# EAGLE board led-er-v3-module (EAGLE 7.5.0)
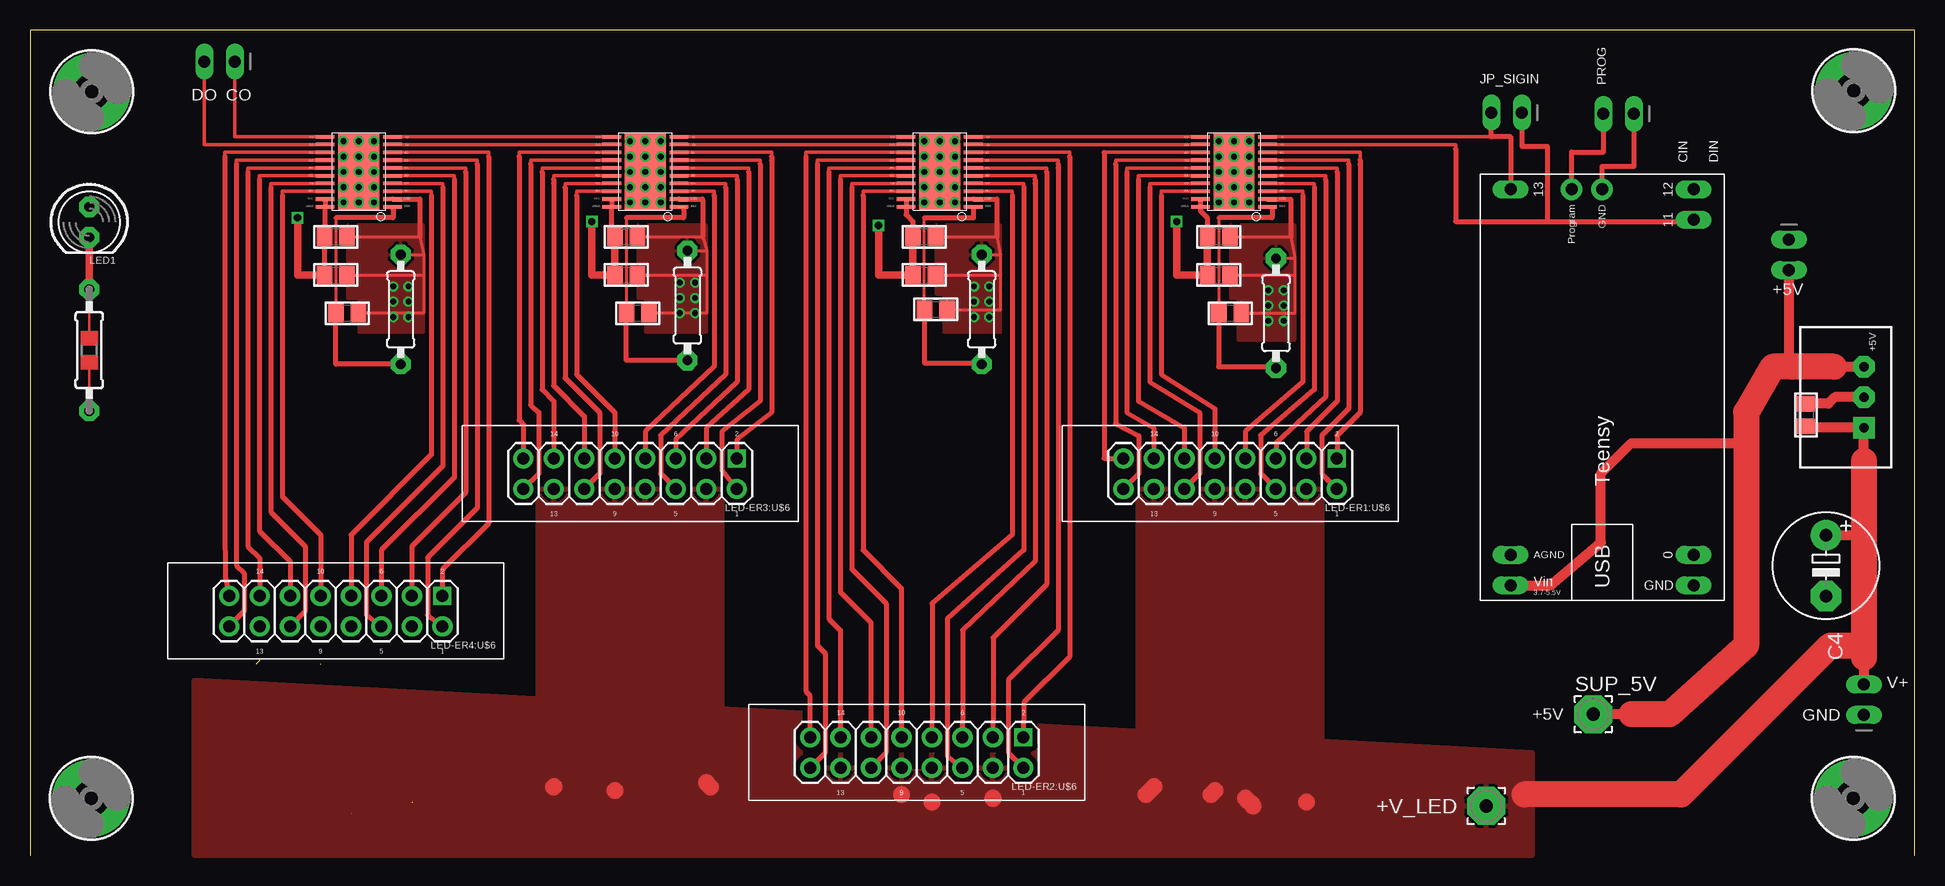
[diagram p0: board, top side]
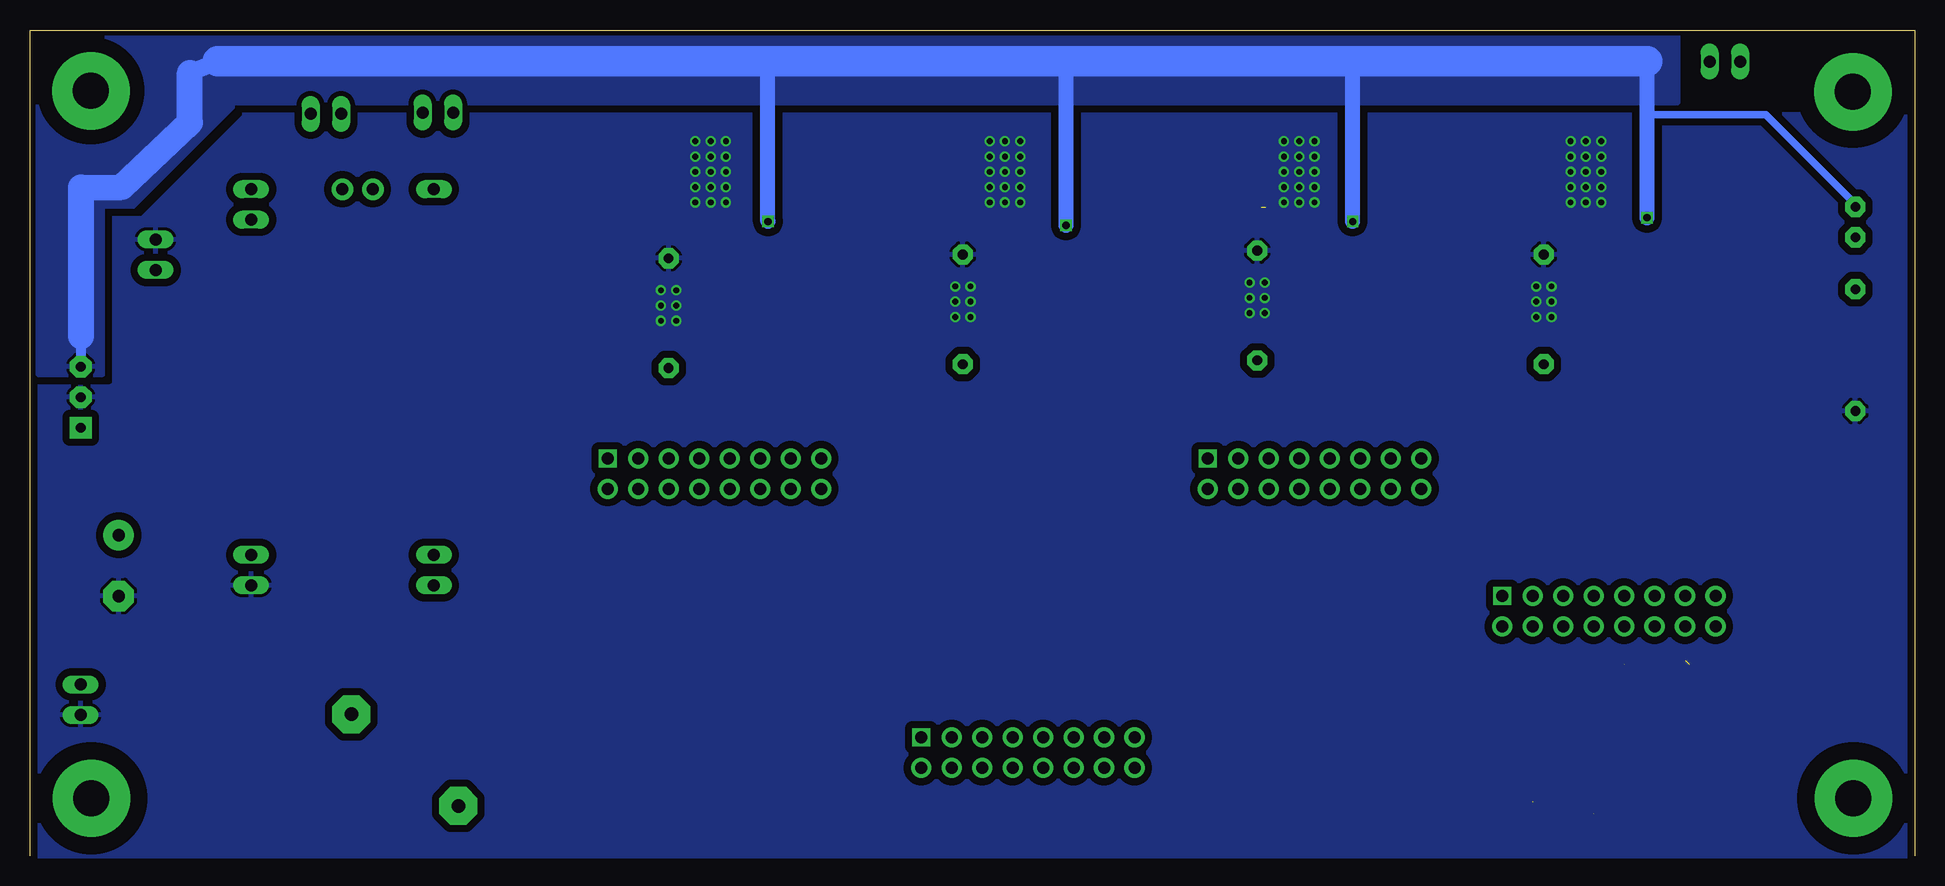
[diagram p1: board, bottom side, seen from below]

Size 157.05 x 68.84 mm. Coordinates in mm from the lower left corner, seen from the top.
Outline: 157.05,0 157.05,68.84 0,68.84 0,0
Copper layers (1*16): Top 0.0356mm / dielectric 1.5011mm / Bottom 0.0356mm
Design rules "LaenPCBOrder": minimum track width 6mil, minimum drill 13mil, track to track 6mil, track to pad 6mil, pad to pad 6mil, via to via 6mil, smd to smd 6mil, copper to edge 15mil, drill to drill 6mil, minimum pad ring 7mil, minimum via ring 7mil, stop-mask expansion 3mil, vias tented up to drill 0mil, thermal gap 10mil
tRestrict: area 24.5,20.1 to 25.2,21.7; area 73.6,7.6 to 74.2,8.6

## Footprints (pad centres in the part's own frame; a part is rotated, then mirrored left to right if it is on the bottom)
3,17/1,1 = drill 1.118 pad 3.175 octagon: 1 0,0
0805 = smd 1.3 x 1.5: 1 -0.95,0; 2 0.95,0
E5-8,5 = drill 1.016 pad 2.54: + -2.54,0 | drill 1.016 pad 2.54 octagon: - 2.54,0
1X02_OVAL = drill 1 long: 1 -1.27,0; 2 1.27,0
LED5MM = drill 0.813 pad 1.676 octagon: A -1.27,0; K 1.27,0
0207/9 = drill 0.813 pad 1.676 octagon: 1 -4.572,0; 2 4.572,0
HTSSOP20DAP = smd 0.3 x 1.55: 1 -2.925,-2.8; 2 -2.275,-2.8; 3 -1.625,-2.8; 4 -0.975,-2.8; 5 -0.325,-2.8; 6 0.325,-2.8; 7 0.975,-2.8; 8 1.625,-2.8; 9 2.275,-2.8; 10 2.925,-2.8; 11 2.925,2.8; 12 2.275,2.8; 13 1.625,2.8; 14 0.975,2.8; 15 0.325,2.8; 16 -0.325,2.8; 17 -0.975,2.8; 18 -1.625,2.8; 19 -2.275,2.8; 20 -2.925,2.8 | smd 6.5 x 3.4: EXP 0,0
2X08_RIBBON = drill 1 pad 1.676: P1 -8.89,1.27; P3 -6.35,1.27; P4 -6.35,-1.27; P5 -3.81,1.27; P6 -3.81,-1.27; P7 -1.27,1.27; P8 -1.27,-1.27; P9 1.27,1.27; P10 1.27,-1.27; P11 3.81,1.27; P12 3.81,-1.27; P13 6.35,1.27; P14 6.35,-1.27; P15 8.89,1.27; P16 8.89,-1.27 | drill 1 square: P2 -8.89,-1.27
0805-THM = drill 0.813 pad 1.676 octagon: 1 -5.08,0; 2 5.08,0
TSR-1 = drill 0.8 pad 1.8 square: 1 -2.54,-1.5 | drill 0.8 pad 1.8 octagon: 2 0,-1.5; 3 2.54,-1.5
MOUNTINGHOLE_3.0_PLATED = drill 3 pad 6.452: P$1 0,0
TEENSY_LEDER = drill 1 pad 1.422 long: 0 12.7,7.62; 11 -15.24,7.62; 12 -17.78,7.62; 13 -17.78,-7.62; AGND 12.7,-7.62; GND 15.24,7.62; VIN 15.24,-7.62 | drill 1 pad 1.778: GND2 -17.78,0; PROG -17.78,-2.54

## Placement (x,y rotation side)
+V_LED  [3,17/1,1]  121.35,4.14 0 top
C3  10uF/16V  [0805]  148,36.74 90 top
C4  220uF+  [E5-8,5]  149.67,24.18 270 top
JP_5V  [1X02_OVAL]  146.58,50.09 270 top
JP_15VIN  [1X02_OVAL]  152.83,13 90 top
JP_PROG  [1X02_OVAL]  132.39,61.85 180 top
JP_SIGIN  [1X02_OVAL]  123.05,61.95 180 top
JP_SIGOUT  [1X02_OVAL]  15.8,66.21 180 top
LED1  Green  [LED5MM]  4.93,52.82 270 top
LED-ER1:C5  1uF/50V  [0805]  99.06,51.6 0 top
LED-ER1:C11  10uF 25V  [0805]  99.06,48.41 0 top
LED-ER1:R3  22K  [0805]  100.01,45.23 0 top
LED-ER1:R6  [0207/9]  103.84,45.23 90 top
LED-ER1:TLC1  TLC59711  [HTSSOP20DAP]  100.33,57.01 90 top
LED-ER1:U$6  HEADER-2X8-RIBBON  [2X08_RIBBON]  100.01,31.85 180 top
LED-ER2:C5  1uF/50V  [0805]  74.53,51.6 0 top
LED-ER2:C11  10uF 25V  [0805]  74.53,48.41 0 top
LED-ER2:R3  22K  [0805]  75.49,45.55 0 top
LED-ER2:R6  [0207/9]  79.31,45.55 90 top
LED-ER2:TLC1  TLC59711  [HTSSOP20DAP]  75.81,57.01 90 top
LED-ER2:U$6  HEADER-2X8-RIBBON  [2X08_RIBBON]  73.9,8.6 180 top
LED-ER3:C5  1uF/50V  [0805]  49.69,48.41 0 top
LED-ER3:C11  10uF 25V  [0805]  49.69,51.6 0 top
LED-ER3:R3  22K  [0805]  50.64,45.23 0 top
LED-ER3:R6  [0207/9]  54.78,45.87 90 top
LED-ER3:TLC1  TLC59711  [HTSSOP20DAP]  51.28,57.01 90 top
LED-ER3:U$6  HEADER-2X8-RIBBON  [2X08_RIBBON]  50.01,31.85 180 top
LED-ER4:C5  1uF/50V  [0805]  25.48,48.41 0 top
LED-ER4:C11  10uF 25V  [0805]  25.48,51.6 0 top
LED-ER4:R3  22K  [0805]  26.44,45.23 0 top
LED-ER4:R6  [0207/9]  30.9,45.55 90 top
LED-ER4:TLC1  TLC59711  [HTSSOP20DAP]  27.39,57.01 90 top
LED-ER4:U$6  HEADER-2X8-RIBBON  [2X08_RIBBON]  25.48,20.39 180 top
R2  470  [0805-THM]  4.93,42.15 90 top
SUP_5V  [3,17/1,1]  130.27,11.79 0 top
TSR1-2450  TSR1-2450  [TSR-1]  151.32,38.23 90 top
U$1  MOUNTINGHOLE  [MOUNTINGHOLE_3.0_PLATED]  151.98,63.77 0 top
U$2  MOUNTINGHOLE  [MOUNTINGHOLE_3.0_PLATED]  5.1,4.78 0 top
U$3  MOUNTINGHOLE  [MOUNTINGHOLE_3.0_PLATED]  5.15,63.69 0 top
U$4  MOUNTINGHOLE  [MOUNTINGHOLE_3.0_PLATED]  151.93,4.78 0 top
U$5  TEENSY_LEDER  [TEENSY_LEDER]  131.01,37.78 270 top

## Library data of the parts
+V_LED SUP_5V = wirepad
C3 JP_5V JP_15VIN JP_PROG JP_SIGIN JP_SIGOUT LED-ER1:C5 LED-ER1:C11 LED-ER1:R3 LED-ER2:C5 LED-ER2:C11 LED-ER2:R3 LED-ER3:C5 LED-ER3:C11 LED-ER3:R3 LED-ER4:C5 LED-ER4:C11 LED-ER4:R3 R2 U$1-U$4 = microbuilder
C4 LED1 LED-ER1:R6 LED-ER1:TLC1 LED-ER2:R6 LED-ER2:TLC1 LED-ER3:R6 LED-ER3:TLC1 LED-ER4:R6 LED-ER4:TLC1 = adafruit
LED-ER1:U$6 LED-ER2:U$6 LED-ER3:U$6 LED-ER4:U$6 U$5 = Andrews
TSR1-2450 = SteelCaveRobotics-Power

## Nets
1SCKI: JP_SIGIN.2 LED-ER1:TLC1.10 U$5.13
1SDTI: JP_SIGIN.1 LED-ER1:TLC1.9 U$5.11
+5V: JP_5V.2 LED1.A LED-ER1:C5.1 LED-ER1:C11.1 LED-ER1:TLC1.19 LED-ER1:TLC1.20 LED-ER2:C5.1 LED-ER2:C11.1 LED-ER2:TLC1.19 LED-ER2:TLC1.20 LED-ER3:C5.1 LED-ER3:C11.1 LED-ER3:TLC1.19 LED-ER3:TLC1.20 LED-ER4:C5.1 LED-ER4:C11.1 LED-ER4:TLC1.19 LED-ER4:TLC1.20 SUP_5V.1 TSR1-2450.3 U$5.VIN
GND: C3.2 C4.- JP_5V.1 JP_15VIN.1 LED-ER1:C5.2 LED-ER1:C11.2 LED-ER1:R3.2 LED-ER1:R6.2 LED-ER1:TLC1.2 LED-ER1:TLC1.EXP LED-ER2:C5.2 LED-ER2:C11.2 LED-ER2:R3.2 LED-ER2:R6.2 LED-ER2:TLC1.2 LED-ER2:TLC1.EXP LED-ER3:C5.2 LED-ER3:C11.2 LED-ER3:R3.2 LED-ER3:R6.2 LED-ER3:TLC1.2 LED-ER3:TLC1.EXP LED-ER4:C5.2 LED-ER4:C11.2 LED-ER4:R3.2 LED-ER4:R6.2 LED-ER4:TLC1.2 LED-ER4:TLC1.EXP R2.1 TSR1-2450.2 U$5.GND
LED-ER1:B0: LED-ER1:TLC1.5 LED-ER1:U$6.P6
LED-ER1:B1: LED-ER1:TLC1.8 LED-ER1:U$6.P2
LED-ER1:B2: LED-ER1:TLC1.15 LED-ER1:U$6.P14
LED-ER1:B3: LED-ER1:TLC1.18 LED-ER1:U$6.P10
LED-ER1:G0: LED-ER1:TLC1.4 LED-ER1:U$6.P5
LED-ER1:G1: LED-ER1:TLC1.7 LED-ER1:U$6.P1
LED-ER1:G2: LED-ER1:TLC1.14 LED-ER1:U$6.P15
LED-ER1:G3: LED-ER1:TLC1.17 LED-ER1:U$6.P11
LED-ER1:IREF: LED-ER1:R3.1 LED-ER1:R6.1 LED-ER1:TLC1.1
LED-ER1:R0: LED-ER1:TLC1.3 LED-ER1:U$6.P8
LED-ER1:R1: LED-ER1:TLC1.6 LED-ER1:U$6.P4
LED-ER1:R2: LED-ER1:TLC1.13 LED-ER1:U$6.P16
LED-ER1:R3: LED-ER1:TLC1.16 LED-ER1:U$6.P12
LED-ER2:B0: LED-ER2:TLC1.5 LED-ER2:U$6.P6
LED-ER2:B1: LED-ER2:TLC1.8 LED-ER2:U$6.P2
LED-ER2:B2: LED-ER2:TLC1.15 LED-ER2:U$6.P14
LED-ER2:B3: LED-ER2:TLC1.18 LED-ER2:U$6.P10
LED-ER2:G0: LED-ER2:TLC1.4 LED-ER2:U$6.P5
LED-ER2:G1: LED-ER2:TLC1.7 LED-ER2:U$6.P1
LED-ER2:G2: LED-ER2:TLC1.14 LED-ER2:U$6.P15
LED-ER2:G3: LED-ER2:TLC1.17 LED-ER2:U$6.P11
LED-ER2:IREF: LED-ER2:R3.1 LED-ER2:R6.1 LED-ER2:TLC1.1
LED-ER2:R0: LED-ER2:TLC1.3 LED-ER2:U$6.P8
LED-ER2:R1: LED-ER2:TLC1.6 LED-ER2:U$6.P4
LED-ER2:R2: LED-ER2:TLC1.13 LED-ER2:U$6.P16
LED-ER2:R3: LED-ER2:TLC1.16 LED-ER2:U$6.P12
LED-ER3:B0: LED-ER3:TLC1.5 LED-ER3:U$6.P6
LED-ER3:B1: LED-ER3:TLC1.8 LED-ER3:U$6.P2
LED-ER3:B2: LED-ER3:TLC1.15 LED-ER3:U$6.P14
LED-ER3:B3: LED-ER3:TLC1.18 LED-ER3:U$6.P10
LED-ER3:G0: LED-ER3:TLC1.4 LED-ER3:U$6.P5
LED-ER3:G1: LED-ER3:TLC1.7 LED-ER3:U$6.P1
LED-ER3:G2: LED-ER3:TLC1.14 LED-ER3:U$6.P15
LED-ER3:G3: LED-ER3:TLC1.17 LED-ER3:U$6.P11
LED-ER3:IREF: LED-ER3:R3.1 LED-ER3:R6.1 LED-ER3:TLC1.1
LED-ER3:R0: LED-ER3:TLC1.3 LED-ER3:U$6.P8
LED-ER3:R1: LED-ER3:TLC1.6 LED-ER3:U$6.P4
LED-ER3:R2: LED-ER3:TLC1.13 LED-ER3:U$6.P16
LED-ER3:R3: LED-ER3:TLC1.16 LED-ER3:U$6.P12
LED-ER4:B0: LED-ER4:TLC1.5 LED-ER4:U$6.P6
LED-ER4:B1: LED-ER4:TLC1.8 LED-ER4:U$6.P2
LED-ER4:B2: LED-ER4:TLC1.15 LED-ER4:U$6.P14
LED-ER4:B3: LED-ER4:TLC1.18 LED-ER4:U$6.P10
LED-ER4:G0: LED-ER4:TLC1.4 LED-ER4:U$6.P5
LED-ER4:G1: LED-ER4:TLC1.7 LED-ER4:U$6.P1
LED-ER4:G2: LED-ER4:TLC1.14 LED-ER4:U$6.P15
LED-ER4:G3: LED-ER4:TLC1.17 LED-ER4:U$6.P11
LED-ER4:IREF: LED-ER4:R3.1 LED-ER4:R6.1 LED-ER4:TLC1.1
LED-ER4:R0: LED-ER4:TLC1.3 LED-ER4:U$6.P8
LED-ER4:R1: LED-ER4:TLC1.6 LED-ER4:U$6.P4
LED-ER4:R2: LED-ER4:TLC1.13 LED-ER4:U$6.P16
LED-ER4:R3: LED-ER4:TLC1.16 LED-ER4:U$6.P12
N$1: LED1.K R2.2
N$2: LED-ER1:TLC1.11 LED-ER2:TLC1.10
N$3: LED-ER1:TLC1.12 LED-ER2:TLC1.9
N$4: LED-ER2:TLC1.11 LED-ER3:TLC1.10
N$5: LED-ER2:TLC1.12 LED-ER3:TLC1.9
N$6: LED-ER3:TLC1.11 LED-ER4:TLC1.10
N$7: LED-ER3:TLC1.12 LED-ER4:TLC1.9
N$8: JP_SIGOUT.1 LED-ER4:TLC1.11
N$9: JP_SIGOUT.2 LED-ER4:TLC1.12
N$54: JP_PROG.1 U$5.GND2
N$55: JP_PROG.2 U$5.PROG
VIN: +V_LED.1 C3.1 C4.+ JP_15VIN.2 LED-ER1:U$6.P3 LED-ER1:U$6.P7 LED-ER1:U$6.P9 LED-ER1:U$6.P13 LED-ER2:U$6.P3 LED-ER2:U$6.P7 LED-ER2:U$6.P9 LED-ER2:U$6.P13 LED-ER3:U$6.P3 LED-ER3:U$6.P7 LED-ER3:U$6.P9 LED-ER3:U$6.P13 LED-ER4:U$6.P3 LED-ER4:U$6.P7 LED-ER4:U$6.P9 LED-ER4:U$6.P13 TSR1-2450.1

## Tracks (layer width: path | path; a pad name or v marks a point on that pad's centre or on a via)
1SCKI
  Top 0.305: LED-ER1:TLC1.10 121.78,59.94
  Top 0.406: U$5.13 123.39,59.94 121.78,59.94 JP_SIGIN.2
1SDTI
  Top 0.305: LED-ER1:TLC1.9 118.81,59.29 118.81,58.92 | 138.63,52.87 U$5.11
  Top 0.406: JP_SIGIN.1 124.32,59.14 126.45,59.14 126.45,52.87 | 118.81,58.92 118.81,52.87 126.45,52.87 | 126.45,52.87 138.63,52.87
+5V  (via drill 0.6)
  Top 0.254: LED-ER1:TLC1.20 | LED-ER3:TLC1.20 48.74,54.09 | LED-ER4:TLC1.20 24.53,54.09 | LED-ER2:C5.1 | LED-ER3:C11.1
  Top 0.305: LED-ER1:C5.1 | LED-ER2:C5.1 | LED-ER4:TLC1.19 24.6,54.61 | LED-ER3:TLC1.19 48.48,54.63 | LED-ER2:TLC1.19 | LED-ER2:TLC1.19 73.01,54.63 | LED-ER1:TLC1.19 97.53,54.65
  Top 0.406: LED-ER4:C5.1 LED-ER4:C11.1 24.59,51.6 LED-ER4:TLC1.20 24.59,54.61 24.6,54.61 | LED-ER1:C5.1 98.1,53.19 97.53,53.76 LED-ER1:TLC1.20 97.53,54.65 | LED-ER2:C5.1 73.58,52.87 73.01,53.44 LED-ER2:TLC1.20 73.01,54.63 | LED-ER3:C11.1 48.48,51.6 LED-ER3:TLC1.20 48.48,54.63 | 73.01,54.63 | LED-ER1:C11.1 | LED-ER2:C11.1
  Top 0.61: v95.56,52.87 95.56,48.41 LED-ER1:C11.1 LED-ER1:C5.1 | v70.71,52.55 70.71,48.41 LED-ER2:C11.1 LED-ER2:C5.1 | LED-ER3:C11.1 LED-ER3:C5.1 46.82,48.41 v46.82,52.87 | LED-ER4:C5.1 22.3,48.41 v22.3,53.19
  Top 0.813: U$5.VIN 126.69,22.54 130.91,26.12 130.91,31.85 133.46,34.4 142.69,34.4 | 147.22,41.02 147.47,40.77 | 133.46,11.79 SUP_5V.1 | TSR1-2450.3 150.34,40.77 | JP_5V.2 146.58,41.02 146.84,40.77
  Top 1.422: 142.69,34.4 143.01,34.4 | 150.34,40.77
  Top 2.184: 133.46,11.79 136.64,11.79 143.01,17.52 143.01,34.4 143.01,36.95 145.24,40.77 146.84,40.77 147.47,40.77 150.34,40.77
  Bottom 0.305: LED1.A 4.93,54.3
  Bottom 0.61: 4.93,54.3 12.42,61.79 22.3,61.79
  Bottom 0.813: 152.81,43.32 TSR1-2450.3
  Bottom 1.016: 22.3,65.93 22.3,66.25
  Bottom 1.27: v95.56,52.87 95.56,66.25 | v70.71,52.55 70.71,66.25 | v46.82,52.87 46.82,66.25 | v22.3,53.19 22.3,61.79 22.3,65.93
  Bottom 1.422: 141.42,66.25 | 152.89,40.83 TSR1-2450.3 | 143.73,65.27 141.42,66.25
  Bottom 2.184: 143.73,65.27 143.73,61.13 149.38,55.74 152.82,55.72 152.81,43.32
  Bottom 2.54: 141.42,66.25 95.56,66.25 70.71,66.25 46.82,66.25 22.3,66.25
  pour Bottom (isolate 0.406): 19.75,62.75 144.61,62.75 144.61,68.8 19.75,68.8
  pour Bottom (isolate 0.406): 140.15,68.16 156.39,68.16 156.39,40.13 150.98,40.13 150.98,54.15 148.43,54.15 140.15,62.43
GND  (via drill 0.48)  (3 unrouted)
  Top 0.254: LED-ER1:C5.2 105.1,51.6 105.42,49.8 | LED-ER1:TLC1.2 | LED-ER1:R3.2 105.42,45.23 105.42,48.41 | 105.42,48.41 105.42,49.8 | LED-ER1:R6.2 105.42,49.8 | LED-ER2:C5.2 | LED-ER2:R3.2 80.9,45.55 80.9,48.41 | 80.9,48.41 80.9,50.12 | 80.9,50.12 80.58,51.6 LED-ER2:C5.2 | LED-ER2:R6.2 80.9,50.12 | 56.38,50.44 56.06,51.6 LED-ER3:C11.2 | 56.38,50.44 56.38,48.41 | 56.38,48.41 56.38,45.23 v55.42,45.23 v54.15,45.23 LED-ER3:R3.2 | LED-ER3:R3.2 | LED-ER3:R6.2 56.38,50.44 | 32.81,50.12 32.49,51.6 LED-ER4:C11.2 | 32.81,50.12 32.81,48.41 | 32.81,48.41 32.81,45.23 LED-ER4:R3.2 | LED-ER4:R6.2 32.81,50.12 | LED-ER4:C5.2 32.81,48.41 | LED-ER3:C5.2 56.38,48.41 | LED-ER2:C11.2 80.9,48.41 | LED-ER1:C11.2 105.42,48.41
  Top 0.305: 32.49,54.74 32.48,54.69 | 56.06,54.74 56.06,54.68 | 105.1,54.74 105.1,54.68
  Top 0.406: 105.1,51.6 105.1,54.68 | 80.58,51.6 80.58,54.74 LED-ER2:TLC1.2 | 56.06,54.68 56.06,51.6 | 32.48,54.69 32.49,51.6 | LED-ER4:TLC1.2 32.49,54.74 | LED-ER3:TLC1.2 56.06,54.74 | LED-ER1:TLC1.2 105.1,54.74
  Top 0.813: TSR1-2450.2 150.4,38.23 149.86,37.68 C3.2
  other vias: 26.12,59.56 27.39,59.56 28.67,59.56 26.12,58.29 27.39,58.29 26.12,57.01 27.39,57.01 28.67,57.01 26.12,55.74 27.39,55.74 28.67,55.74 26.12,54.47 27.39,54.47 28.67,54.47 28.67,58.29 99.06,59.56 100.33,59.56 101.61,59.56 99.06,58.29 100.33,58.29 101.61,58.29 99.06,57.01 100.33,57.01 101.61,57.01 99.06,55.74 100.33,55.74 101.61,55.74 99.06,54.47 100.33,54.47 101.61,54.47 74.53,59.56 75.81,59.56 77.08,59.56 74.53,58.29 75.81,58.29 77.08,58.29 74.53,57.01 75.81,57.01 77.08,57.01 74.53,55.74 75.81,55.74 77.08,55.74 74.53,54.47 75.81,54.47 77.08,54.47 50.01,59.56 51.28,59.56 52.56,59.56 50.01,58.29 51.28,58.29 50.01,57.01 51.28,57.01 52.56,57.01 50.01,55.74 51.28,55.74 52.56,55.74 50.01,54.47 51.28,54.47 52.56,54.47 52.56,58.29 30.26,47.46 30.26,46.18 31.53,46.18 30.26,44.91 31.53,44.91 31.53,47.46 54.15,47.78 55.42,47.78 54.15,46.5 55.42,46.5 78.67,47.46 78.67,46.18 78.67,44.91 79.95,44.91 79.95,46.18 79.95,47.46 103.2,47.14 104.47,47.14 103.2,45.87 104.47,45.87 103.2,44.59 104.47,44.59
  pour Top: 100.01,52.56 100.01,46.5 100.65,46.5 100.65,43 105.43,43 105.43,52.56
  pour Top: 75.49,52.56 75.49,46.82 76.13,46.82 76.13,43.64 80.9,43.64 80.9,52.56
  pour Top: 50.64,46.5 51.28,46.5 51.28,43.64 56.38,43.64 56.38,52.56 50.64,52.56
  pour Top: 26.44,52.56 26.44,46.5 27.39,46.5 27.39,43.64 32.81,43.64 32.81,52.56
  pour Bottom (isolate 0.61, rank 2): 0,61.79 157.67,61.79 156.71,0 0,0
LED-ER1:B0
  Top 0.305: 103.84,33.13 LED-ER1:U$6.P6 | LED-ER1:TLC1.5 107.98,56.69 107.98,56.37
  Top 0.406: 103.84,33.13 103.84,34.4 107.98,38.22 107.98,56.37
LED-ER1:B1
  Top 0.305: 108.93,33.15 LED-ER1:U$6.P2 | LED-ER1:TLC1.8 110.84,58.64 110.84,57.65
  Top 0.406: 110.84,58 110.84,57.65 110.84,36.95 108.93,35.04 108.93,33.15
LED-ER1:B2
  Top 0.305: LED-ER1:TLC1.15 91.41,57.34 91.41,57.02
  Top 0.406: 91.41,57.02 91.41,36.95 93.66,35.65 LED-ER1:U$6.P14
LED-ER1:B3
  Top 0.305: LED-ER1:TLC1.18 94.28,55.39 94.28,55.07
  Top 0.406: 94.28,55.07 94.28,40.13 98.74,37.26 LED-ER1:U$6.P10
LED-ER1:G0
  Top 0.305: LED-ER1:TLC1.4 107.02,56.04 107.02,55.72
  Top 0.406: 107.02,55.72 107.02,38.86 102.56,35.04 102.56,31.84 LED-ER1:U$6.P5
LED-ER1:G1
  Top 0.305: LED-ER1:TLC1.7 109.89,57.99 109.89,57.67
  Top 0.406: LED-ER1:U$6.P1 107.66,31.83 107.66,35.04 109.89,37.27 109.89,57.67
LED-ER1:G2
  Top 0.305: LED-ER1:TLC1.14 90.46,57.99 90.46,57.67
  Top 0.406: LED-ER1:U$6.P15 92.41,31.83 92.41,35 90.46,35.99 90.46,57.67
LED-ER1:G3
  Top 0.305: LED-ER1:TLC1.17 93.33,56.04 93.33,55.72
  Top 0.406: LED-ER1:U$6.P11 97.47,31.84 97.47,36.95 93.33,39.5 93.33,55.72
LED-ER1:IREF
  Top 0.254: LED-ER1:TLC1.1 103.52,54.09 | 99.06,53.19 LED-ER1:R3.1 | 103.84,40.77 LED-ER1:R6.1
  Top 0.305: 103.52,54.09 103.51,54.09 103.51,53.97
  Top 0.406: 99.06,53.19 103.52,53.19 103.52,53.97 103.51,53.97 | LED-ER1:R3.1 99.06,40.77 103.84,40.77
LED-ER1:R0
  Top 0.305: LED-ER1:U$6.P8 | LED-ER1:TLC1.3 106.07,55.39 106.07,55.07
  Top 0.406: 106.07,55.07 106.07,39.5 101.29,35.35 LED-ER1:U$6.P8
LED-ER1:R1
  Top 0.305: 106.38,33.14 LED-ER1:U$6.P4 | LED-ER1:TLC1.6 108.93,57.34 108.93,57.02
  Top 0.406: 106.38,33.14 106.38,35.35 108.93,37.9 108.93,57.02
LED-ER1:R2
  Top 0.305: LED-ER1:TLC1.13 89.5,58.64
  Top 0.406: 89.5,58.64 89.5,33.13 LED-ER1:U$6.P16
LED-ER1:R3
  Top 0.305: LED-ER1:TLC1.16 92.37,56.69 92.37,56.37
  Top 0.406: 92.37,56.37 92.37,37.9 96.2,35.66 LED-ER1:U$6.P12
LED-ER2:B0
  Top 0.305: LED-ER2:TLC1.5 83.77,56.69 83.77,56.06
  Top 0.406: 83.77,56.37 83.77,56.06 83.77,24.53 77.72,18.79 77.72,12.75 LED-ER2:U$6.P6
LED-ER2:B1
  Top 0.305: LED-ER2:TLC1.8 86.64,58.64 86.64,58.32
  Top 0.406: 86.64,58.32 86.64,16.59 82.81,12.77 LED-ER2:U$6.P2
LED-ER2:B2
  Top 0.305: LED-ER2:TLC1.15 66.57,57.34 66.57,57.02
  Top 0.406: 66.57,57.02 66.57,19.75 67.53,18.79 67.53,9.89 LED-ER2:U$6.P14
LED-ER2:B3
  Top 0.305: LED-ER2:TLC1.18 69.44,55.39 69.44,55.07
  Top 0.406: 69.44,55.07 69.44,25.48 72.62,22.3 LED-ER2:U$6.P10
LED-ER2:G0
  Top 0.305: LED-ER2:TLC1.4 82.81,56.04 82.81,55.74
  Top 0.406: 82.81,55.74 82.81,25.48 76.44,19.75 76.44,8.27 LED-ER2:U$6.P5
LED-ER2:G1
  Top 0.305: LED-ER2:TLC1.7 85.68,57.99 85.68,57.33
  Top 0.406: 85.68,57.67 85.68,57.33 85.68,18.79 81.54,14.65 81.54,8.58 LED-ER2:U$6.P1
LED-ER2:G2
  Top 0.305: LED-ER2:TLC1.14 65.61,57.99 65.61,57.33
  Top 0.406: LED-ER2:U$6.P15 66.25,8.58 66.25,16.88 65.61,17.52 65.61,57.33 65.61,57.67
LED-ER2:G3
  Top 0.305: LED-ER2:TLC1.17 68.48,56.04 68.48,55.42
  Top 0.406: 68.48,55.72 68.48,55.42 68.48,23.89 71.35,21.02 71.35,8.59 LED-ER2:U$6.P11
LED-ER2:IREF
  Top 0.254: 74.53,53.19 LED-ER2:R3.1 | 79.31,41.09 LED-ER2:R6.1
  Top 0.305: LED-ER2:TLC1.1 78.61,53.94
  Top 0.406: 74.53,53.19 78.61,53.19 78.61,53.94 | LED-ER2:R3.1 74.53,41.09 79.31,41.09
LED-ER2:R0
  Top 0.305: LED-ER2:TLC1.3 81.86,55.39 81.86,54.78
  Top 0.406: 81.86,55.07 81.86,54.78 81.86,26.75 75.17,21.02 75.17,12.74 LED-ER2:U$6.P8
LED-ER2:R1
  Top 0.305: LED-ER2:TLC1.6 84.72,57.34 84.72,57.02
  Top 0.406: 84.72,57.02 84.72,22.61 80.27,18.16 80.27,12.76 LED-ER2:U$6.P4
LED-ER2:R2
  Top 0.305: LED-ER2:TLC1.13 64.66,58.64 64.66,58.32
  Top 0.406: 64.66,58.32 64.66,13.7 64.98,13.38 64.98,9.9 LED-ER2:U$6.P16
LED-ER2:R3
  Top 0.305: LED-ER2:TLC1.16 67.53,56.69 67.53,56.37
  Top 0.406: 67.53,56.37 67.53,21.98 70.07,19.43 70.07,9.88 LED-ER2:U$6.P12
LED-ER3:B0
  Top 0.305: LED-ER3:TLC1.5 58.92,56.69 58.92,56.37
  Top 0.406: 58.92,56.37 58.92,39.5 53.82,34.71 LED-ER3:U$6.P6
LED-ER3:B1
  Top 0.305: LED-ER3:TLC1.8 61.79,58.64 61.79,57.97
  Top 0.406: 61.79,58.32 61.79,57.97 61.79,36.95 58.9,34.69 LED-ER3:U$6.P2
LED-ER3:B2
  Top 0.305: LED-ER3:TLC1.15 42.68,57.34 42.68,57.02
  Top 0.406: 42.68,57.02 42.68,38.86 43.66,37.88 LED-ER3:U$6.P14
LED-ER3:B3
  Top 0.305: LED-ER3:TLC1.18 45.55,55.39 45.55,55.07
  Top 0.406: 45.55,55.07 45.55,40.13 48.74,36.94 LED-ER3:U$6.P10
LED-ER3:G0
  Top 0.305: LED-ER3:TLC1.4 57.97,56.04 57.97,55.72
  Top 0.406: 57.97,55.72 57.97,40.13 52.55,35.04 52.55,31.84 LED-ER3:U$6.P5
LED-ER3:G1
  Top 0.305: LED-ER3:TLC1.7 60.84,57.99 60.84,57.67
  Top 0.406: 60.84,57.67 60.84,37.9 57.65,35.35 57.65,32.15 LED-ER3:U$6.P1
LED-ER3:G2
  Top 0.305: LED-ER3:TLC1.14 41.73,57.99 41.73,57.67
  Top 0.406: LED-ER3:U$6.P15 42.4,31.83 42.4,36.95 41.73,37.59 41.73,57.67
LED-ER3:G3
  Top 0.305: LED-ER3:TLC1.17 44.59,56.04 44.59,55.72
  Top 0.406: 44.59,55.72 44.59,39.81 47.46,36.95 47.46,31.84 LED-ER3:U$6.P11
LED-ER3:IREF  (1 unrouted)
  Top 0.254: 49.69,53.19 LED-ER3:R3.1
  Top 0.305: 54.47,54.09 54.47,53.9
  Top 0.406: 49.69,53.19 54.47,53.19 54.47,53.9 | LED-ER3:R6.1 49.69,41.29 LED-ER3:R3.1
LED-ER3:R0
  Top 0.305: LED-ER3:TLC1.3 57.01,55.39 57.01,55.07
  Top 0.406: 57.01,55.07 57.01,40.77 51.28,35.35 LED-ER3:U$6.P8
LED-ER3:R1
  Top 0.305: LED-ER3:TLC1.6 59.88,57.34 59.88,57.02
  Top 0.406: 59.88,57.02 59.88,38.86 56.36,35.65 LED-ER3:U$6.P4
LED-ER3:R2
  Top 0.305: LED-ER3:TLC1.13 40.77,58.64 40.77,58.32
  Top 0.406: 40.77,58.32 40.77,36.31 41.12,35.96 LED-ER3:U$6.P16
LED-ER3:R3
  Top 0.305: LED-ER3:TLC1.16 43.64,56.69 43.64,56.06
  Top 0.406: 43.64,56.37 43.64,56.06 43.64,39.18 46.2,36.62 LED-ER3:U$6.P12
LED-ER4:B0
  Top 0.305: LED-ER4:TLC1.5 35.35,56.69 35.35,56.37
  Top 0.406: 35.35,56.37 35.35,31.53 29.29,25.47 LED-ER4:U$6.P6
LED-ER4:B1
  Top 0.305: LED-ER4:TLC1.8 38.22,58.64 38.22,58.32
  Top 0.406: 38.22,58.32 38.22,27.71 34.37,23.86 LED-ER4:U$6.P2
LED-ER4:B2
  Top 0.305: LED-ER4:TLC1.15 18.16,57.34 18.16,57.02
  Top 0.406: 18.16,57.02 18.16,25.8 19.13,24.82 LED-ER4:U$6.P14
LED-ER4:B3
  Top 0.305: LED-ER4:TLC1.18 21.02,55.39 21.02,55.07
  Top 0.406: 21.02,55.07 21.02,29.94 24.21,26.75 LED-ER4:U$6.P10
LED-ER4:G0
  Top 0.305: LED-ER4:TLC1.4 34.4,56.04 34.4,55.72
  Top 0.406: 34.4,55.72 34.4,32.49 28.03,26.12 28.03,20.06 LED-ER4:U$6.P5
LED-ER4:G1
  Top 0.305: LED-ER4:TLC1.7 37.27,57.99 37.27,57.67
  Top 0.406: 37.27,57.67 37.27,28.98 33.13,24.84 33.13,20.04 LED-ER4:U$6.P1
LED-ER4:G2
  Top 0.305: LED-ER4:TLC1.14 17.2,57.99 17.2,57.67
  Top 0.406: 17.2,57.67 17.2,24.21 17.84,23.57 17.84,20.39 16.59,19.14 LED-ER4:U$6.P15
LED-ER4:G3
  Top 0.305: LED-ER4:TLC1.17 20.07,56.04 20.07,55.72
  Top 0.406: 20.07,55.72 20.07,28.67 22.93,25.8 22.93,20.39 LED-ER4:U$6.P11
LED-ER4:IREF
  Top 0.254: LED-ER4:TLC1.1 30.26,54.09 | 25.49,53.19 LED-ER4:R3.1
  Top 0.305: 30.26,54.09 30.26,53.89
  Top 0.406: 25.49,53.19 30.26,53.19 30.26,53.89 | LED-ER4:R6.1 25.49,40.98 LED-ER4:R3.1
LED-ER4:R0
  Top 0.305: LED-ER4:TLC1.3 33.44,55.39 33.44,55.07
  Top 0.406: 33.44,55.07 33.44,33.44 26.75,26.75 LED-ER4:U$6.P8
LED-ER4:R1
  Top 0.305: LED-ER4:TLC1.6 36.31,57.34 36.31,57.02
  Top 0.406: 36.31,57.02 36.31,30.26 31.83,25.78 LED-ER4:U$6.P4
LED-ER4:R2
  Top 0.305: LED-ER4:TLC1.13 16.24,58.64 16.24,57.97
  Top 0.406: 16.24,58.32 16.24,57.97 16.24,27.71 16.27,23.22 LED-ER4:U$6.P16
LED-ER4:R3
  Top 0.305: LED-ER4:TLC1.16 19.11,56.69 19.11,56.37
  Top 0.406: 19.11,56.37 19.11,27.07 21.67,24.51 LED-ER4:U$6.P12
N$1
  Top 0.305: R2.2
  Top 0.61: LED1.K R2.2
N$2
  Top 0.305: LED-ER2:TLC1.10 LED-ER1:TLC1.11 | LED-ER1:TLC1.11
N$3
  Top 0.305: LED-ER2:TLC1.9 LED-ER1:TLC1.12 | LED-ER1:TLC1.12
N$4
  Top 0.305: LED-ER2:TLC1.11 LED-ER3:TLC1.10
N$5
  Top 0.305: LED-ER3:TLC1.9 LED-ER2:TLC1.12
N$6
  Top 0.305: LED-ER3:TLC1.11 LED-ER4:TLC1.10
N$7
  Top 0.305: LED-ER4:TLC1.9 LED-ER3:TLC1.12
N$8
  Top 0.305: JP_SIGOUT.1 17.07,59.94 LED-ER4:TLC1.11
N$9
  Top 0.305: LED-ER4:TLC1.12 14.53,59.29 JP_SIGOUT.2
N$54
  Top 0.305: JP_PROG.1
  Top 0.406: U$5.GND2 131.01,57.47 133.67,57.47 JP_PROG.1
N$55
  Top 0.305: JP_PROG.2
  Top 0.406: U$5.PROG 128.47,58.67 131.13,58.67 JP_PROG.2
VIN  (4 unrouted)
  Top 0.61: LED-ER2:U$6.P3 80.25,7.03 80.27,7.01
  Top 0.813: C3.1 148.09,35.69 TSR1-2450.1 152.83,32.92 | 152.83,16.5 152.83,16.18 JP_15VIN.2 | C4.+ 152.79,26.72 152.83,25.8
  Top 1.422: 43.66,5.75 43.64,5.73 | 48.74,5.42 48.73,5.42 | 56.7,5.73 56.36,6.07 56.38,6.09 | 72.63,5.1 72.62,5.1 | 75.17,4.46 | 80.25,4.8 80.27,4.78 | 93.66,5.75 93.01,5.1 | 98.74,5.42 98.42,5.1 | 101.28,4.78 101.92,4.14 | 106.36,4.48 106.38,4.46
  Top 2.184: 124.54,5.1 137.6,5.1 150.02,17.52 152.51,17.52 152.83,17.84 | 152.83,32.92 152.83,25.8 152.83,17.84 | 152.83,17.84 152.83,16.5
  pour Top (isolate 0.406): 13.7,14.65 125.18,8.6 125.18,0 13.7,0
  pour Top (isolate 0.406): 42.36,30.58 57.65,30.58 57.65,5.1 42.36,5.1
  pour Top (isolate 0.406): 92.37,30.58 107.66,30.58 107.66,3.82 92.37,3.82

## Text on the board
tPlace: PROG | DO | CO | CIN | DIN | +5V | V+ | +5V | GND